# Altium PCB PCB1.PcbDoc
Units mm, origin at the board's own origin, x right, y up, seen from the top; angles counter-clockwise.
Board outline 56.33 x 87.03 mm, 2 copper layers (Top Layer, Bottom Layer), stack 1.752 mm thick; 33 components, 36 nets, 139 pads, 24 vias.
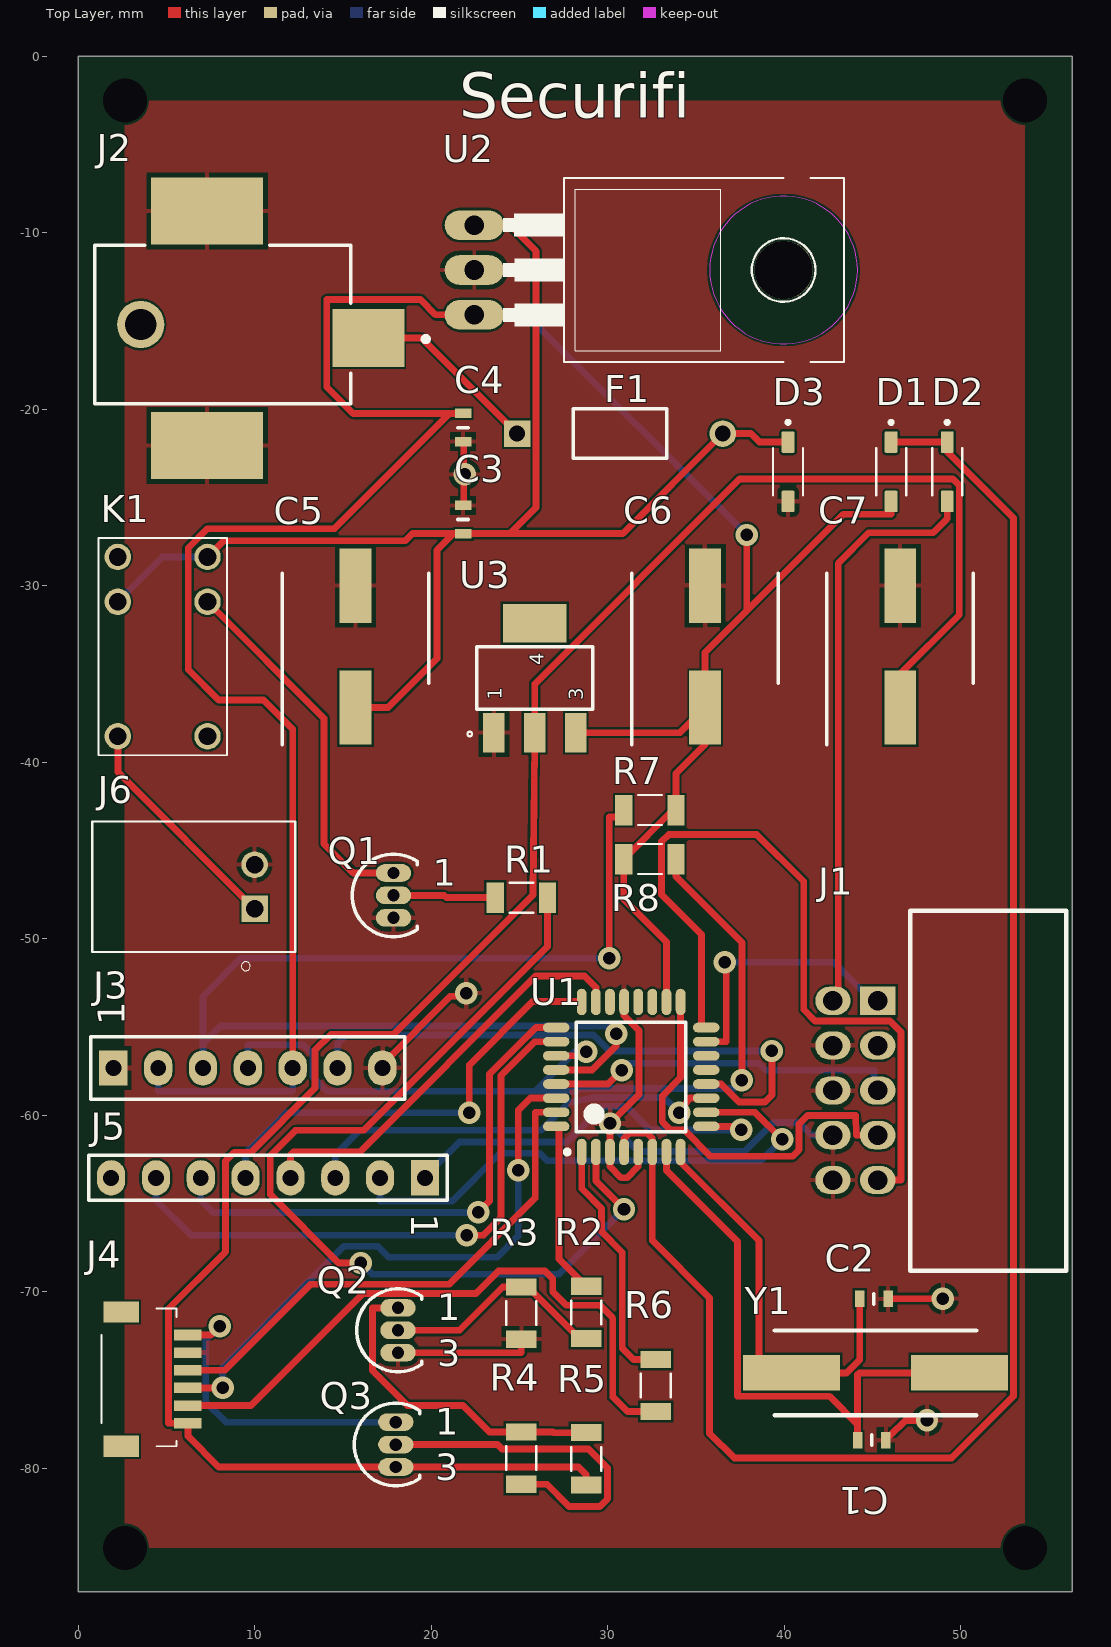
[diagram p0: Top Layer view]
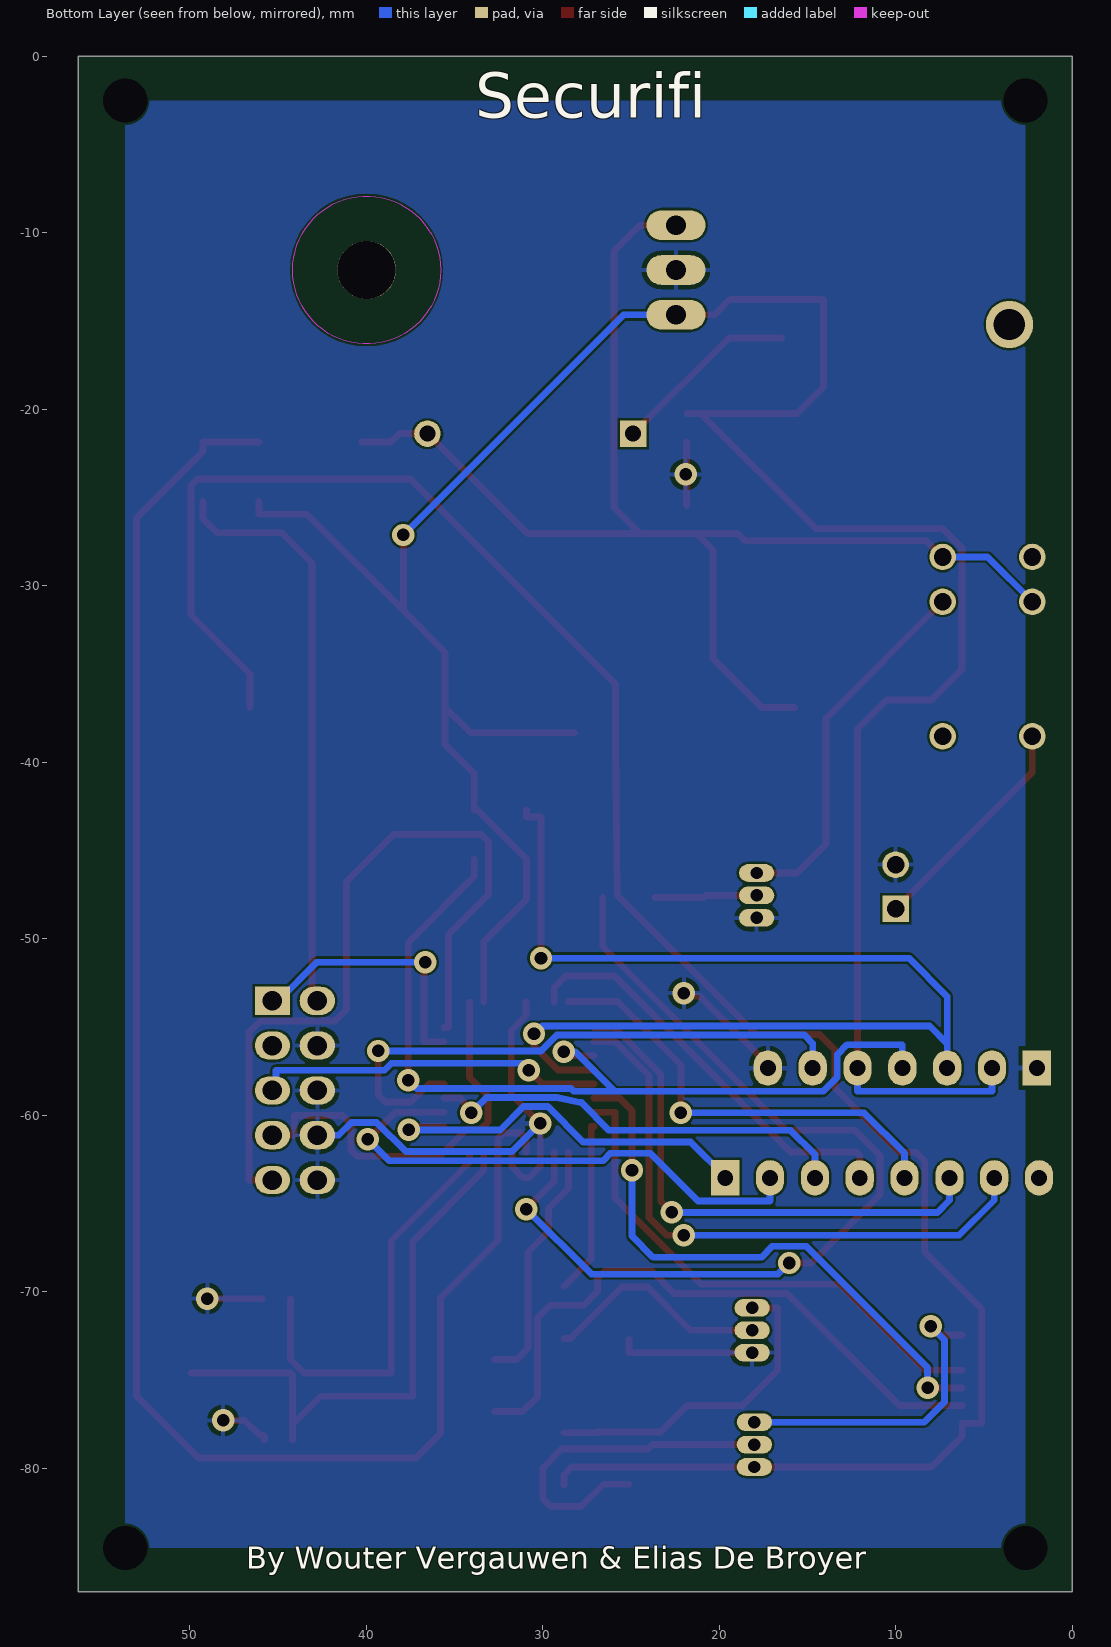
[diagram p1: Bottom Layer view, seen from below]
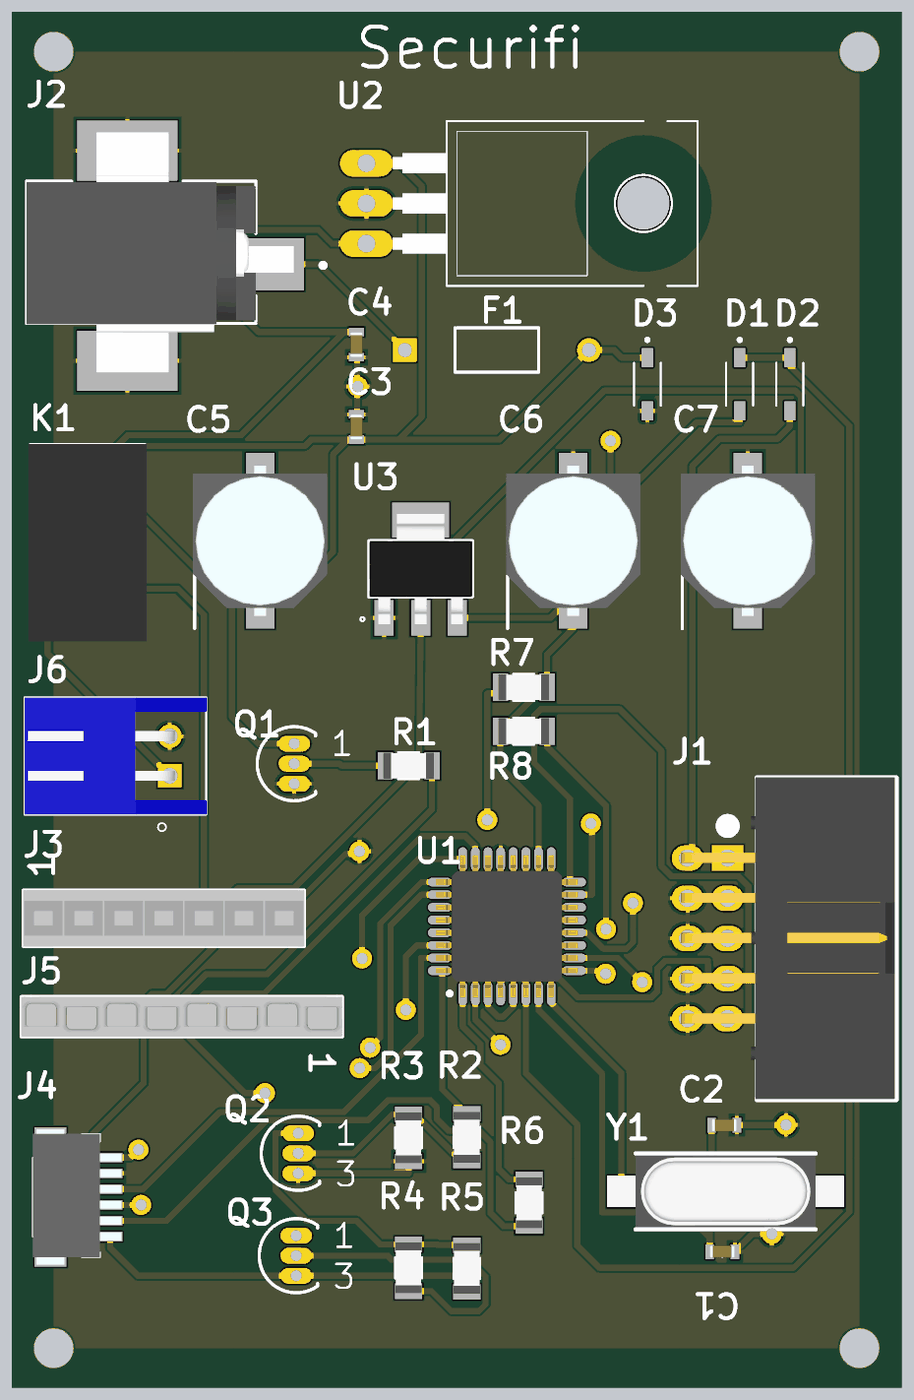
[diagram p2: 3D render of the assembled board from above, using the file's embedded part models]

## Layer stack, top to bottom
Top Solder: solder mask 0.01, Solder Resist, Dk 3.5
Top Layer: signal copper 0.0762
Dielectric 1: dielectric 1.6, FR-4, Dk 4.8
Bottom Layer: signal copper 0.0762
Bottom Solder: solder mask 0.01, Solder Resist, Dk 3.5

## Board outline
-0.002,-87.025 56.325,-87.025 56.325,0 -0.002,0

## Design rules (kind name [scope] priority, off if disabled: settings)
BoardOutlineClearance [All] p1: gap=0.2 ignorepadtopadclearanceinfootprint=FALSE
Clearance [All] p1: gap=0.127 ignorepadtopadclearanceinfootprint=TRUE
HoleSize [All] p1: absolutevalues=TRUE maxlimit=3.302 minlimit=0.025 maxpercent=80.000 minpercent=20.000
HoleToHoleClearance [All] p1: gap=0.127 allowstackedmicrovias=TRUE
MinimumAnnularRing [All] p1: minimumring=0.076
MinimumSolderMaskSliver [All] p1: minsoldermaskwidth=0.025
PolygonConnect [All] p1: connectstyle=Relief reliefconductorwidth=0.254 reliefentries=4 polygonreliefangle="90 Angle" airgapwidth=0.254
RoutingVias [All] p1: holewidth=0.711 width=1.27 viastyle="Through Hole" minholewidth=0.711 minwidth=1.27 maxholewidth=0.711 maxwidth=1.27
SilkToSilkClearance [All] p1: silktosilkclearance=0
SilkToSolderMaskClearance [IsPad] p1: minsilkscreentomaskgap=0 clearancetoexposedcopper=TRUE
SolderMaskExpansion [All] p1: expansion=0.102 istentingtop=FALSE
UnRoutedNet [All] p1: checkbadconnections=TRUE
Width [All] p1: maxlimit=0.5 minlimit=0.386 preferedwidth=0.386
24 further rules are at their usual default settings.

## Components (designator, comment, footprint, x,y, rotation, side; value= is the part's Value field where it differs from the comment)
C1 "C0603C104K5RACTU" CAPC1608X80N 44.965,-78.419 r180 top value=18pF
C2 "C0603C104K5RACTU" CAPC1608X80N 45.092,-70.418 r180 top value=18pF
C3 "C0603C104K5RACTU" CAPC1608X80N 21.813,-26.26 r270 top value=100nF
C4 "C0603C104K5RACTU" CAPC1608X80N 21.813,-21.053 r90 top value=100nF
C5 "EEE2AA100UP" CAPAE830X650N 15.717,-33.461 r90 top value=10µF
C6 "EEE2AA100UP" CAPAE830X650N 35.529,-33.461 r90 top value=10µF
C7 "EEE2AA100UP" CAPAE830X650N 46.578,-33.461 r90 top value=10µF
D1 "1N4148W-7-F" SOD3715X135N 46.07,-23.555 r270 top
D2 "1N4148W-7-F" SOD3715X135N 49.245,-23.555 r270 top
D3 "1N4148W-7-F" SOD3715X135N 40.228,-23.555 r270 top
F1 "" PIN-W2/E2.8 30.703,-21.396 r0 top
J1 "61201021721" Male_10Pin 44.038,-57.591 r0 top
J2 "RASM722X" RASM722X 10.002,-15.427 r270 top
J3 "1x7" DIP7 9.621,-57.337 r90 top
J4 "665106131822" 665106131822 3.779,-74.863 r270 top
J5 "215297-8" DIP8 10.764,-63.56 r270 top
J6 "S2B-XH-A(LF)(SN) (2)" JST_S2B-XH-A(LF)(SN) 10.002,-47.07 r90 top
K1 "G5V-1 12DC" G5V-1 4.795,-33.461 r270 top
Q1 "BC547B" TO-92 17.876,-47.558 r0 top
Q2 "BC547B" TO-92 18.13,-72.196 r0 top
Q3 "BC557ATA" TO-92 18.003,-78.673 r0 top
R1 "CRCW08051K00FKEAHP" RESC3116X65N 25.115,-47.685 r0 top value=1K
R2 "CRCW08051K00FKEAHP" RESC3116X65N 28.798,-71.185 r90 top value=1K
R3 "CRCW120610K0FKEAHP" RESC3116X65N 25.115,-71.224 r90 top value=10K
R4 "CRCW08051K00FKEAHP" RESC3116X65N 25.115,-79.44 r90 top value=1K
R5 "CRCW2512100KFKEG" RESC3116X65N 28.798,-79.479 r270 top value=100K
R6 "CRCW08051K00FKEAHP" RESC3116X65N 32.735,-75.327 r90 top value=1K
R7 "CRCW06031K80FKEA" RESC3116X65N 32.4,-42.725 r180 top value=1K8
R8 "CRCW06031K80FKEA" RESC3116X65N 32.4,-45.5 r0 top value=1K8
U1 "ATMEGA328P-MU" TQFP80P900X900X120-32N 31.338,-57.845 r90 top
U2 "LM7805" TO220 31.211,-12.125 r270 top
U3 "NCP1117ST33T3G" SOT223 25.877,-35.239 r90 top
Y1 "9C-8.000MAAJ-T" SMD-HC-49-S 45.181,-74.609 r180 top

## Footprints (in the part's own frame and the unit in brackets; to place one, negate y for a bottom-side part, rotate by r counter-clockwise, add the part's x,y. Pads: shape width x height; smd on the part's side, far side on the other; paste and mask are expansions set on the pad)
665106131822 [mm]
  rect 0.6x1.55 smd: 1(-2.4,2.444) 2(-1.4,2.444) 3(-0.4,2.444) 4(0.6,2.444) 5(1.6,2.444) 6(2.6,2.444)
  rect 1.2x2 smd: 7(-3.7,-1.331) 8(3.9,-1.331)
  silkscreen extent -3.9,-2.44 3.9,1.81, body extent -4.18,-2.44 4.38,3.16, height 3
CAPAE830X650N [mm]
  rect 4.2x1.8 smd: 1(-3.45,0) 2(3.45,0)
  silkscreen extent -5.55,-4.15 4.15,4.15, body extent -4.75,-4.25 4.75,4.25, height 6.5
CAPC1608X80N [mm]
  rect 0.54x0.94 smd: 1(-0.8,0) 2(0.8,0)
  silkscreen extent 0,-0.3 0,0.3, body extent -0.8,-0.4 0.8,0.4, height 0.8
DIP7 [mm]
  rect 2x1.6 hole 0.9: 1(0,7.62)
  oval 2x1.6 hole 0.9: 2(0,5.08) 3(0,2.54) 4(0,0) 5(0,-2.54) 6(0,-5.08) 7(0,-7.62)
  silkscreen extent -1.78,-8.89 1.78,8.89, body extent -1.78,-8.89 1.78,8.89, height 8.64
DIP8 [mm]
  rect 2x1.6 hole 0.9: 1(0,8.89)
  oval 2x1.6 hole 0.9: 2(0,6.35) 3(0,3.81) 4(0,1.27) 5(0,-1.27) 6(0,-3.81) 7(0,-6.35) 8(0,-8.89)
  silkscreen extent -1.27,-10.16 1.27,10.16, body extent -1.27,-10.16 1.25,10.16, height 2.89
G5V-1 [mm]
  round 1.5 hole 1: 1(-5.08,-2.54) 2(-2.54,-2.54) 5(5.08,-2.54) 6(5.08,2.54) 9(-2.54,2.54) 10(-5.08,2.54)
  silkscreen extent -6.15,-3.64 6.15,3.64, body extent -6.12,-3.75 6.38,3.75, height 10.01
JST_S2B-XH-A(LF)(SN) [mm]
  rect 1.508x1.508 hole 1: 1(-1.25,0)
  round 1.508 hole 1: 2(1.25,0)
  silkscreen extent -4.75,-2.3 3.7,9.2, body extent -3.7,-2.32 3.7,9.18, height 5.95
Male_10Pin [mm]
  rect 2x1.6 hole 1.1: 1(1.27,4.064)
  oval 2x1.6 hole 1.1: 2(-1.27,4.064) 3(1.27,1.524) 4(-1.27,1.524) 5(1.27,-1.016) 6(-1.27,-1.016) 7(1.27,-3.556) 8(-1.27,-3.556) 9(1.27,-6.096) 10(-1.27,-6.096)
  round 1.524 on Top Overlay: ""(1.27,6.096)
  silkscreen extent 3.11,-11.24 11.96,9.16, body extent -1.7,-11.18 11.85,9.18, height 8.86
PIN-W2/E2.8 [mm] "Thru-Hole; 2 Leads"
  rect 1.5x1.5 hole 0.9: 1(-5.825,0)
  round 1.5 hole 0.9: 2(5.825,0)
  silkscreen extent -2.65,-1.4 2.65,1.4
RASM722X [mm]
  rect 3.3x4.06 smd: 1(0.545,6.45)
  rect 3.81x6.35 smd: 2(-6.645,-2.69) 3(6.645,-2.69)
  round 2.68 hole 1.78: 4(-0.215,-6.45)
  silkscreen extent -4.72,-9.06 4.28,9.84, body extent -7.82,-9.06 7.39,7.84, height 11.09
RESC3116X65N [mm]
  rect 0.97x1.73 smd: 1(-1.48,0) 2(1.48,0)
  silkscreen extent -0.67,-0.85 0.67,0.85, body extent -1.6,-0.83 1.6,0.83, height 0.54
SMD-HC-49-S [mm]
  rect 5.5x2 smd: 1(-4.75,0) 2(4.75,0)
  silkscreen extent -5.7,-2.4 5.7,2.4, body extent -7.5,-2.25 7.5,2.25, height 5.1
SOD3715X135N [mm]
  rrect18% 1.21x0.73 smd: A(1.68,0) C(-1.68,0)
  silkscreen extent -2.9,-0.85 1.35,0.85
SOT223 [mil]
  rect 88x48 smd: 1(-122,91) 2(-122,0) 3(-122,-91)
  rect 86.61x141.73 smd: 4(122,0)
  silkscreen extent -130,-129 70,150, body extent -137,-128 137,128, height 63
TO220 [mil]
  oval 66x132 hole 44: 1(-100,-345) 2(0,-345) 3(100,-345)
  round 130 hole 130 unplated: ""(0,345)
  Keep-Out Layer circle w0: c0,345 r165
  Keep-Out Layer circle w0: c0,345 r165
  silkscreen extent -205,-280 205,480
TO-92 [mm] "TO, Flat Index; 3 In-Line, Axial Leads; Body Dia. 4.6mm; Leads 0.41 x 0.39 mm (max)"
  oval 2x1 hole 0.7: 1(0,1.27) 2(0,0) 3(0,-1.27)
  silkscreen extent -2.34,-2.34 1.35,2.34
TQFP80P900X900X120-32N [mm] "TQFP, 32-Leads, Body 7.00x7.00mm, Pitch 0.80mm, IPC Medium Density"
  oval 1.5x0.55 smd: 1(-4.25,2.8) 2(-4.25,2) 3(-4.25,1.2) 4(-4.25,0.4) 5(-4.25,-0.4) 6(-4.25,-1.2) 7(-4.25,-2) 8(-4.25,-2.8) 17(4.25,-2.8) 18(4.25,-2) 19(4.25,-1.2) 20(4.25,-0.4) 21(4.25,0.4) 22(4.25,1.2) 23(4.25,2) 24(4.25,2.8)
  oval 0.55x1.5 smd: 9(-2.8,-4.25) 10(-2,-4.25) 11(-1.2,-4.25) 12(-0.4,-4.25) 13(0.4,-4.25) 14(1.2,-4.25) 15(2,-4.25) 16(2.8,-4.25) 25(2.8,4.25) 26(2,4.25) 27(1.2,4.25) 28(0.4,4.25) 29(-0.4,4.25) 30(-1.2,4.25) 31(-2,4.25) 32(-2.8,4.25)
  silkscreen extent -4.37,-3.1 3.1,3.75, body extent -4.5,-4.5 4.5,4.5, height 1.6

## Part data
C1 C2 C3 C4: library part Cap, "Capacitor", Supplier Part Number 1=2392305, LatestRevisionDate=17-Jul-2002, LatestRevisionNote="Re-released for DXP Platform.", PackageDescription="Radial Cap, Thru-Hole; 2 Leads; 0.3 in Pin Spacing", PackageReference=RAD-0.3, Published=8-Jun-2000, Publisher="Altium Limited", Supplier 1=Farnell
C5 C6 C7: library part Cap2, "Capacitor", Supplier Part Number 1=2805714, PackageDescription="Capacitor; 2 Leads", PackageReference=CAPR5-4X5, Published=23-Sep-2002, Publisher="Altium Limited", Supplier 1=Farnell
D1 D2 D3: "Diode Standard 100V 300mA _DC_ Surface Mount SOD-123", Package="SOD-123 Diodes Inc.", Supplier Part Number 1=1776392, Availability=Unavailable, MF="Diodes Inc.", MP=1N4148W-7-F, Price=None, SnapEDA_Link=https://www.snapeda.com/parts/1N4148W-7-F/Diodes%20Inc./view-part/16/?ref=snap, Supplier 1=Farnell
F1: library part "Fuse 1", "Fuse", Supplier Part Number 1=9949585, LatestRevisionDate=17-Jul-2002, LatestRevisionNote="Re-released for DXP Platform.", PackageDescription="Thru-Hole; 2 Leads", PackageReference=PIN-W2/E2.8, Published=8-Jun-2000, Publisher="Altium Limited", Supplier 1=Farnell
J1: "CONN HEADER R/A 10POS 2.54MM", Color=Black, Current Rating=3A, Flammability Rating="UL94 V-0", Insulation Resistance=1GR, Manufacturer="Wurth Electronics", Max Operating Temperature=125°C, Min Operating Temperature=-40°C, Package Quantity=260, Supplier Part Number 1=732-2098-ND, Voltage Rating=250V, Category="Headers and Wire Housings", ComponentLink1Description=https://datasheet.ciiva.com/731/61201021721-731348.pdf?src-supplier=Digi-Key, ComponentLink1URL=https://datasheet.ciiva.com/731/61201021721-731348.pdf?src-supplier=Digi-Key, ComponentLink2Description=https://datasheet.ciiva.com/13679/6120xx21721-265860-13679056.pdf?src-supplier=Mouser, ComponentLink2URL=https://datasheet.ciiva.com/13679/6120xx21721-265860-13679056.pdf?src-supplier=Mouser, ComponentLink3Description=https://datasheet.ciiva.com/7648/624622-7648122.pdf?src-supplier=Element14, ComponentLink3URL=https://datasheet.ciiva.com/7648/624622-7648122.pdf?src-supplier=Element14, ComponentLink4Description=https://datasheet.ciiva.com/48700/001088159-da-01-en-wr-bhd-wannenstiftleiste-61201021721-48700602.pdf?src-supplier=Conrad, ComponentLink4URL=https://datasheet.ciiva.com/48700/001088159-da-01-en-wr-bhd-wannenstiftleiste-61201021721-48700602.pdf?src-supplier=Conrad, Connector Type="Male Pin", Contact Gender=Male, Contact Material="Copper Alloy,Copper", Contact Plating=Gold, Gender=Male, Height=8.85mm, Housing Material=PBT, Insulation=Insulated, Length=20.36mm, Manufacturer Part Number=61201021721, Mount="Through Hole", Number of Contacts=10, Number of Positions=10, Number of Rows=2, Orientation="Right Angle", Packaging=Tray, Pitch=2.54mm, Pricing 1="1=0,59000, 10=0,58200, 50=0,53800, 100=0,48200, 260=0,43738 (USD)", REACH SVHC=Unknown, RoHS=Yes, Row Spacing=0.1inch, Stock 1=2053, Supplier 1=Digi-Key, Termination="Through Hole", Width=20.36mm
J2: "SWC RASM722X Connectors > Audio - Video > Circular-Audio > XLR - Connector", Color=Black, Current Rating=5A, Manufacturer=Switchcraft, Package Quantity=1, Supplier Part Number 1=1608728, Voltage Rating (AC)=250V, Body Material=Thermoplastic, Category=Connectors, ComponentLink1Description=https://datasheet.ciiva.com/7661/640105-7661962.pdf?src-supplier=Element14, ComponentLink1URL=https://datasheet.ciiva.com/7661/640105-7661962.pdf?src-supplier=Element14, ComponentLink2Description=https://datasheet.ciiva.com/391/edg4-391815.pdf?src-supplier=Digi-Key, ComponentLink2URL=https://datasheet.ciiva.com/391/edg4-391815.pdf?src-supplier=Digi-Key, ComponentLink3Description=https://datasheet.ciiva.com/16879/70214270-16879445.pdf?src-supplier=Allied+Electronics, ComponentLink3URL=https://datasheet.ciiva.com/16879/70214270-16879445.pdf?src-supplier=Allied+Electronics, Connector Type=Jack,Power, Contact Material="Copper Alloy,Brass", Contact Plating=Tin,Nickel, Depth=17.1mm, Gender=Male, Housing Color=Black, Housing Material=Thermoplastic, Lead Free="Lead Free", Length=15.2mm, Manufacturer Part Number=RASM722X, Max Current Rating=5A, Mount="Surface Mount,PCB", Number of Contacts=2, Number of Ports=1, Number of Terminals=3, Orientation="Right Angle", Packaging=Bulk, Pricing 1="1=2,37000, 10=1,78000, 50=1,60000, 100=1,43000, 250=1,33000, 500=1,30000 (EUR)", REACH SVHC="No SVHC", RoHS=Yes, Shielding=Unshielded, Stock 1=4265, Supplier 1=Farnell, Termination=Solder
J3: library part 534237-5, "7 pin header voor schermpje", Color=Black, Contact Current Rating=2A, Contact Resistance=12MR, Flammability Rating="UL94 V-0", High Temperature Compatible=No, Insulation Resistance=5GR, Manufacturer="TE Connectivity", Max Operating Temperature=105°C, Min Operating Temperature=-65°C, Package Quantity=32, Supplier Part Number 1=A26419-ND, Voltage Rating=750V, Approvals=CSA, Boss="No (Without)", Category="Headers and Wire Housings", ComponentLink1Description=https://datasheet.ciiva.com/3118/eng-ds-1307819-ampmodu-0811-3118408.pdf?src-supplier=Avnet, ComponentLink1URL=https://datasheet.ciiva.com/3118/eng-ds-1307819-ampmodu-0811-3118408.pdf?src-supplier=Avnet, ComponentLink2Description=https://datasheet.ciiva.com/743/eng-cd-534237-r5-743694.pdf?src-supplier=Digi-Key, ComponentLink2URL=https://datasheet.ciiva.com/743/eng-cd-534237-r5-743694.pdf?src-supplier=Digi-Key, Connector Type=Receptacle,Connector,Socket, Contact Material=Bronze, Contact Plating=Gold,Tin,Lead, Contact Post Length=2.92mm, Contact Shape=Square, Current Rating=2A, Depth=3.56mm, ELV=Non-Compliant, Gender=Female, Height=3.56mm, Housing Color=Black, Housing Material=Polyester, Lead Free="Contains Lead", Length=17.78mm, Manufacturer Part Number=534237-5, Mount="Through Hole", Number of Contacts=7, Number of Positions=7, Number of Rows=1, Orientation=Straight, Packaging=Rail/Tube, PCB Mount Retention=Without, PCB Mounting Orientation=Vertical, PCB Thickness=2.4mm, Pitch=2.54mm, Pricing 1="1=1,62000, 10=1,47000, 100=1,26000, 500=1,05000, 1000=0,90000, 5000=0,79800, 10000=0,78000 (USD)", Radiation Hardening=No, RoHS=Yes, Row Spacing=0.1inch, Sealable="No (Without)", Stackable=Yes, Stock 1=4174, Supplier 1=Digi-Key, Tail Length=2.92mm, Termination=Solder
J4: library part SM06B-SRSS-TB_LF_SN, Supplier Part Number 1=2470758, Supplier 1=Farnell
J5: "8 pin female keypad", Color=Green, Contact Current Rating=3A, Contact Resistance=12mR, Flammability Rating="UL94 V-0", Housing Color=Black, Manufacturer="TE Connectivity", Max Operating Temperature=105°C, Min Operating Temperature=-55°C, Package Quantity=88, Supplier Part Number 1=A106654-ND, Category="Headers and Wire Housings", ComponentLink1Description=https://datasheet.ciiva.com/30062/2152978-30062389.pdf?src-supplier=Onlinecomponents.com, ComponentLink1URL=https://datasheet.ciiva.com/30062/2152978-30062389.pdf?src-supplier=Onlinecomponents.com, ComponentLink2Description=https://datasheet.ciiva.com/11747/0900766b805762f6-11747560.pdf?src-supplier=RSComponents, ComponentLink2URL=https://datasheet.ciiva.com/11747/0900766b805762f6-11747560.pdf?src-supplier=RSComponents, ComponentLink3Description=https://datasheet.ciiva.com/29369/001094895-da-01-en-buchsenleiste-1-reihig-0-0215297-8-29369956.pdf?src-supplier=Conrad, ComponentLink3URL=https://datasheet.ciiva.com/29369/001094895-da-01-en-buchsenleiste-1-reihig-0-0215297-8-29369956.pdf?src-supplier=Conrad, ComponentLink4Description=https://datasheet.ciiva.com/6857/eng-cd-215297-d-basefilename-6857496.pdf?src-supplier=Digi-Key, ComponentLink4URL=https://datasheet.ciiva.com/6857/eng-cd-215297-d-basefilename-6857496.pdf?src-supplier=Digi-Key, Connector Type=Receptacle,Connector,Socket, Contact Gender=Female, Contact Material=Bronze, Contact Plating=Gold,Tin, Contact Post Length=3.1mm, Contact Shape=Square, Current Rating=3A, Depth=2.52mm, ELV=Compliant, Fastening Type=Push,Pull, Gender=Receptacle, Height=7mm, Housing Material=Polyester, Insulation Color=Green, Insulation Material=Glass, Length=20.32mm, Manufacturer Part Number=215297-8, Mount="Through Hole", Number of Contacts=8, Number of Positions=8, Number of Rows=1, Orientation=Straight, Packaging=Tray, PCB Mount Retention=With, PCB Mounting Orientation=Vertical, PCB Thickness=1.6mm, Pitch=2.54mm, Pricing 1="1=1,97000, 10=1,78900, 100=1,53300, 500=1,27750, 1000=1,09500, 5000=0,97090, 10000=0,94900 (USD)", Radiation Hardening=No, REACH SVHC=Unknown, RoHS=Yes, Sealable="No (Without)", Stackable=Yes, Stock 1=17481, Supplier 1=Digi-Key, Tail Length=3.1mm, Termination=Solder
J6: "Conn Shrouded Header HDR 2 POS 2.5mm Solder RA Thru-Hole Box", Color=Natural, Contact Resistance=20mR, Current Rating=3A, Housing Color=White, Insulation Resistance=1GR, Manufacturer=JST, Manufacturer Part Number=S2B-XH-A(LF)(SN), Max Operating Temperature=85°C, Max Voltage Rating (AC)=250V, Min Operating Temperature=-25°C, Package Quantity=1000, Supplier Part Number 1=1516289, Category="Headers and Wire Housings", ComponentLink1Description=https://datasheet.ciiva.com/16208/s2b-xh-alfsn-16208978.pdf?src-supplier=Future+Electronics, ComponentLink1URL=https://datasheet.ciiva.com/16208/s2b-xh-alfsn-16208978.pdf?src-supplier=Future+Electronics, ComponentLink2Description=https://datasheet.ciiva.com/8052/1684882-8052211.pdf?src-supplier=Element14, ComponentLink2URL=https://datasheet.ciiva.com/8052/1684882-8052211.pdf?src-supplier=Element14, ComponentLink3Description=https://datasheet.ciiva.com/11746/0900766b8082f560-11746947.pdf?src-supplier=RSComponents, ComponentLink3URL=https://datasheet.ciiva.com/11746/0900766b8082f560-11746947.pdf?src-supplier=RSComponents, ComponentLink4Description=https://datasheet.ciiva.com/26894/getdatasheetpartid-640270-26894603.pdf?src-supplier=Verical, ComponentLink4URL=https://datasheet.ciiva.com/26894/getdatasheetpartid-640270-26894603.pdf?src-supplier=Verical, ComponentLink5Description=https://datasheet.ciiva.com/26924/getdatasheetpartid-645395-26924076.pdf?src-supplier=Verical, ComponentLink5URL=https://datasheet.ciiva.com/26924/getdatasheetpartid-645395-26924076.pdf?src-supplier=Verical, ComponentLink6Description=https://datasheet.ciiva.com/26894/getdatasheetpartid-441330-26894909.pdf?src-supplier=Verical, ComponentLink6URL=https://datasheet.ciiva.com/26894/getdatasheetpartid-441330-26894909.pdf?src-supplier=Verical, ComponentLink7Description=https://datasheet.ciiva.com/726/exh-726412.pdf?src-supplier=Digi-Key, ComponentLink7URL=https://datasheet.ciiva.com/726/exh-726412.pdf?src-supplier=Digi-Key, ComponentLink8Description=https://datasheet.ciiva.com/20207/523653-20207183.pdf?src-supplier=Rapid+Electronics, ComponentLink8URL=https://datasheet.ciiva.com/20207/523653-20207183.pdf?src-supplier=Rapid+Electronics, Connector Type="Male Pin", Contact Material=Brass, Contact Plating=Tin,Copper,Lead, Depth=11.5mm, Gender=Male, Housing Material=Polyamide, Lead Free="Lead Free", Lead Pitch=2.5mm, Length=7.4mm, Max Current Rating=3A, Max Voltage Rating (DC)=250V, Mount="Through Hole", Number of Contacts=2, Number of Positions=2, Number of Rows=1, Orientation="Right Angle", Packaging=Bulk, Pitch=2.5mm, Pricing 1="100=0,10300, 500=0,08760, 1000=0,07160, 2500=0,06770, 5000=0,06370, 10000=0,05770 (EUR)", REACH SVHC="No SVHC", RoHS=Yes, Stock 1=54713, Supplier 1=Farnell, Termination=Press-Fit, Voltage Rating=250V, Voltage Rating (AC)=250V, Wire/Cable Gauge=22AWG
K1: library part Relay-SPDT, "Single-Pole Dual-Throw Relay", Supplier Part Number 1=9949585, LatestRevisionDate=17-Jul-2002, LatestRevisionNote="Re-released for DXP Platform.", PackageReference=MODULE5B, Published=24-Mar-1999, Publisher="Altium Limited", Supplier 1=Farnell
Q1 Q2: library part NPN, "NPN Bipolar Transistor", Supplier Part Number 1=1017673, Code_JEDEC=TO-226-AA, LatestRevisionDate=17-Jul-2002, LatestRevisionNote="Re-released for DXP Platform.", PackageDescription="TO, Flat Index; 3 In-Line, Axial Leads; Body Dia. 4.8mm; Leads 0.55 x 0.51 mm (max)", PackageReference=TO-226-AA, Published=8-Jun-2000, Publisher="Altium Limited", Supplier 1=Farnell
Q3: library part PNP, "PNP Bipolar Transistor", Supplier Part Number 1=2453803, LatestRevisionDate=29-May-2009, LatestRevisionNote="IPC-7351 Footprint Added.", PackageDescription="3-Pin SOT-23 Package 0.95 mm Pitch, 2.4 mm Lead Span", PackageReference=SOT-23B, PackageVersion=Aug-1999, Published=8-Jun-2000, Publisher="Altium Limited", Supplier 1=Farnell
R1 R2 R4 R6: library part Res2, "Resistor", Supplier Part Number 1=1738959, LatestRevisionDate=17-Jul-2002, LatestRevisionNote="Re-released for DXP Platform.", PackageDescription="Axial Device, Thru-Hole; 2 Leads; 0.4 in Pin Spacing", PackageReference=AXIAL-0.4, Published=8-Jun-2000, Publisher="Altium Limited", Supplier 1=Farnell
R3: library part Res2, "Resistor", Supplier Part Number 1=1739026, LatestRevisionDate=17-Jul-2002, LatestRevisionNote="Re-released for DXP Platform.", PackageDescription="Axial Device, Thru-Hole; 2 Leads; 0.4 in Pin Spacing", PackageReference=AXIAL-0.4, Published=8-Jun-2000, Publisher="Altium Limited", Supplier 1=Farnell
R5: library part Res2, "Resistor", Supplier Part Number 1=2614347, LatestRevisionDate=17-Jul-2002, LatestRevisionNote="Re-released for DXP Platform.", PackageDescription="Axial Device, Thru-Hole; 2 Leads; 0.4 in Pin Spacing", PackageReference=AXIAL-0.4, Published=8-Jun-2000, Publisher="Altium Limited", Supplier 1=Farnell
R7 R8: library part Res2, "Resistor", Supplier Part Number 1=1738908, LatestRevisionDate=17-Jul-2002, LatestRevisionNote="Re-released for DXP Platform.", PackageDescription="Axial Device, Thru-Hole; 2 Leads; 0.4 in Pin Spacing", PackageReference=AXIAL-0.4, Published=8-Jun-2000, Publisher="Altium Limited", Supplier 1=Farnell
U1: "MICROCHIP - ATMEGA328P-MU - MCU 8BIT, AVR, 32K FLASH, 32QFN", Case/Package=VQFN, Frequency=20MHz, Manufacturer=Microchip, Max Operating Temperature=85°C, Min Operating Temperature=-40°C, Supplier Part Number 1=ATMEGA328P-MU-ND, Category=Microcontrollers, ComponentLink1Description=http://www.farnell.com/datasheets/2047852.pdf?src-supplier=Farnell, ComponentLink1URL=http://www.farnell.com/datasheets/2047852.pdf?src-supplier=Farnell, ComponentLink2Description=http://www.microchip.com/mymicrochip/filehandler.aspx?ddocname=en589968&src-supplier=Digi-Key, ComponentLink2URL=http://www.microchip.com/mymicrochip/filehandler.aspx?ddocname=en589968&src-supplier=Digi-Key, ComponentLink3Description=http://www.farnell.com/datasheets/798182.pdf?src-supplier=Newark, ComponentLink3URL=http://www.farnell.com/datasheets/798182.pdf?src-supplier=Newark, ComponentLink4Description=http://www.farnell.com/datasheets/2047852.pdf?src-supplier=Element14, ComponentLink4URL=http://www.farnell.com/datasheets/2047852.pdf?src-supplier=Element14, Core Architecture=AVR, Interface=I2C,SPI,UART,USART, Manufacturer Part Number=ATMEGA328P-MU, Memory Size=32KB, Memory Type=FLASH, Number of I/Os=23, Oscillator Type=Internal, Packaging=Tray, Peripherals="Brown-out Detect/Reset,POR,PWM,WDT", Pricing 1="1=2,01000, 25=1,84000, 100=1,67000 (USD)", RoHS=No, Stock 1=5700, Supplier 1=Digi-Key
U2: "Linear Voltage Regulator IC 1 Output 1.5A SOT-223-4", Package="TO-220 Texas Instruments", Availability=Unavailable, MF="Texas Instruments", MP=LM7805, Price=None, SnapEDA_Link=https://www.snapeda.com/parts/LM7805/Texas%20Instruments/view-part/2302466/?ref=snap
U3: "Linear Voltage Regulator IC 1 Output 1A SOT-223", Package="TO-261-4 HTC Korea", Availability=Unavailable, MF="ON Semiconductor", MP=NCP1117ST33T3G, Price=None, SnapEDA_Link=https://www.snapeda.com/parts/NCP1117ST33T3G/ON%20Semiconductor/view-part/802519/?ref=snap
Y1: library part XTAL, "Crystal Oscillator", Supplier Part Number 1=1842346, LatestRevisionDate=17-Jul-2002, LatestRevisionNote="Re-released for DXP Platform.", PackageDescription="Crystal, Thru-Hole; 2 Leads; Body 3.1 x 8.2 mm (Dia.xH)", PackageReference=R38, Published=8-Jun-2000, Publisher="Altium Limited", Supplier 1=Farnell

## Free pads (board coordinates)
  round 1.524 hole 2.5: 7(53.65,-84.525) 8(2.65,-84.525) 9(2.65,-2.525) 10(53.65,-2.525)

## Via types
v1: diameter 1.27, hole 0.711, Top Layer to Bottom Layer, 24 vias

## Nets (pads, with @x,y where several pads share a name; then routed paths per layer and width w, separated by ;. In a path a pad name is that pad's centre, name@x,y a point inside that pad or via, vN(x,y) a via of type N, cw(c..) or ccw(c..) an arc to the next point about the centre after c; other vN are vias at no path point)
+3.3: C7.1 J4.6 Q3.3 R5.2 U3.2 | length 122
  Top Layer w0.386: R5.2 28.798,-80.387 28.353,-79.943 Q3.3 7.97,-79.943 6.223,-78.196 J4.6 5.125,-77.463 5.125,-70.977 8.351,-67.751 8.351,-62.607 8.846,-62.112 9.799,-62.112 13.431,-58.48 13.431,-56.321 14.32,-55.432 17.876,-55.432 25.775,-47.533 25.877,-38.871 U3.2 25.877,-35.569 37.485,-23.961 49.562,-23.961 49.931,-24.33 49.931,-31.658 46.578,-35.01 C7.1
+5: C4.2 C6.1 D1.A J3.2 J3.5 R7.1 R8.1 U1.18 U2.3 U3.3 | length 153.8
  Top Layer w0.386: J3.5 12.161,-38.135 10.51,-36.484 7.97,-36.484 6.243,-34.756 6.243,-27.873 7.335,-26.781 14.523,-26.781 21.051,-20.253 ; C4.2 21.051,-20.253 ; U2.3 20.264,-14.665 19.4,-13.801 14.091,-13.801 14.091,-18.754 15.59,-20.253 21.051,-20.253 ; U3.3 34.102,-38.338 C6.1 ; U1.18 33.338,-50.205 30.92,-47.787 R8.1 33.695,-42.725 R7.1 33.88,-40.649 35.529,-39 C6.1 ; v1(37.891,-27.136) 37.891,-31.429 ; D1.A 46.07,-25.968 43.352,-25.968 37.891,-31.429 ; C6.1 35.529,-33.791 37.891,-31.429
  Bottom Layer w0.386: J3.2 4.541,-58.658 12.161,-58.658 J3.5 ; U2.3 25.42,-14.665 v1(37.891,-27.136)
+12: F1.1 J2.1 | length 10.7
  Top Layer w0.386: J2.1 19.454,-15.972 F1.1
GND: C1.1 C2.1 C3.1 C4.1 C5.2 C6.2 C7.2 D3.A J1.4 J1.6 J1.8 J1.10 J2.2 J2.3 J3.1 J3.7 J4.2 J6.2 Q1.3 Q2.3 R3.1 U1.3 U1.5 U1.21 U2.2 U3.1 | length 51.6
  Top Layer w0.386: J3.7 17.241,-57.137 21.109,-53.269 21.831,-53.269 v1(22,-53.1) ; Q2.3 25.115,-73.466 R3.1 ; C3.1 21.856,-25.416 21.856,-21.896 C4.1 ; U1.21 30.938,-54.367 31.779,-55.207 31.779,-58.839 v1(30.138,-60.48) U1.3 30.138,-62.925 30.773,-63.56 31.103,-63.56 31.738,-62.925 U1.5 ; C1.1 45.765,-78.219 45.842,-78.142 46.042,-78.142 46.884,-77.3 v1(48.1,-77.3) ; C2.1 45.901,-70.409 48.991,-70.409 v1(49,-70.4)
  Bottom Layer w0.386: v1(30.138,-60.48) 31.735,-62.077 37.746,-62.077 39.402,-60.421 40.838,-60.421 41.564,-61.147 J1.8
  other v1: 21.9,-23.7
NetC1_2: C1.2 U1.7 Y1.1 | length 32.5
  Top Layer w0.386: U1.7 33.338,-63.147 37.358,-67.167 37.358,-75.93 42.565,-75.93 44.165,-77.53 ; C1.2 44.165,-77.53 ; Y1.1 44.267,-74.609 44.165,-74.711 44.165,-77.53
NetC2_2: C2.2 U1.8 Y1.2 | length 23.8
  Top Layer w0.386: U1.8 34.138,-62.677 38.577,-67.116 38.577,-74.609 Y1.2 43.53,-74.609 44.292,-73.847 C2.2
NetC3_2: C3.2 C5.1 D3.C F1.2 K1.2 K1.10 U2.1 | length 76.1
  Top Layer w0.386: K1.10 8.249,-27.467 18.536,-27.467 18.943,-27.06 21.28,-27.06 ; C5.1 15.717,-36.915 17.571,-36.915 20.34,-34.147 20.34,-28 21.28,-27.06 ; U2.1 24.48,-9.585 25.953,-11.058 25.953,-25.587 24.48,-27.06 ; D3.C 38.599,-21.875 38.12,-21.396 F1.2 30.864,-27.06 24.48,-27.06 ; 21.28,-27.06 C3.2 24.48,-27.06
  Bottom Layer w0.386: K1.2 4.795,-28.381 K1.10
NetD1_C: D1.C D2.C U1.4 U1.6 | length 98.7
  Top Layer w0.386: U1.4 30.938,-61.337 31.256,-61.02 32.22,-61.02 32.538,-61.337 U1.6 32.538,-67.122 35.783,-70.367 35.783,-78.038 37.18,-79.435 49.499,-79.435 53.004,-75.93 53.004,-26.171 49.245,-22.412 D2.C D1.C
NetD2_A: D2.A J1.2 | length 33.3
  Top Layer w0.386: J1.2 43.073,-53.527 43.073,-28.737 44.8,-27.009 48.458,-27.009 49.245,-26.222 D2.A
NetJ1_1: J1.1 U1.15 | length 15.2
  Top Layer w0.386: U1.15 36.723,-55.845 36.723,-51.419 v1(36.647,-51.343)
  Bottom Layer w0.386: v1(36.647,-51.343) 42.793,-51.343 44.978,-53.527 J1.1
NetJ1_5: J1.5 U1.29 | length 20
  Top Layer w0.386: U1.29 30.017,-58.245 v1(30.798,-57.464)
  Bottom Layer w0.386: v1(30.798,-57.464) 31.195,-57.068 38.567,-57.068 38.963,-57.464 45.105,-57.464 45.105,-58.607 J1.5
NetJ1_7: J1.7 U1.17 | length 23.1
  Top Layer w0.386: U1.17 34.138,-57.877 33.101,-58.914 33.101,-60.385 33.548,-60.832 34.325,-60.832 35.831,-62.338 40.487,-62.338 40.853,-61.972 40.853,-60.503 41.329,-60.027 44.061,-60.027 44.089,-61.147 J1.7
NetJ1_9: J1.9 U1.16 | length 44.1
  Top Layer w0.386: U1.16 35.326,-55.045 35.326,-49.768 33.065,-47.507 33.065,-44.51 33.472,-44.104 38.45,-44.104 41.117,-46.771 41.117,-54.035 41.752,-54.67 45.994,-54.67 46.629,-55.305 46.629,-63.687 J1.9
NetJ3_3: J3.3 R7.2 U1.28 | length 65.8
  Top Layer w0.386: U1.28 29.128,-57.445 30.491,-56.082 v1(30.491,-55.403) ; v1(30.093,-51.114) 30.093,-43.113 30.92,-43.113 R7.2
  Bottom Layer w0.386: J3.3 7.081,-55.94 ; v1(30.093,-51.114) 9.24,-51.114 7.081,-53.273 7.081,-55.94 ; v1(30.491,-55.403) 30.043,-54.954 8.067,-54.954 7.081,-55.94
NetJ3_4: J3.4 R8.2 U1.27 | length 51.1
  Top Layer w0.386: U1.27 28.322,-56.645 28.544,-56.423 v1(28.8,-56.423) ; R8.2 33.88,-46.491 37.612,-50.223 v1(37.612,-58.023)
  Bottom Layer w0.386: J3.4 9.621,-56.016 12.745,-56.016 13.304,-56.575 13.304,-57.845 14.117,-58.658 25.895,-58.658 ; v1(28.8,-56.423) 28.13,-56.423 25.895,-58.658 ; v1(37.612,-58.023) 37.136,-58.498 28.385,-58.498 28.226,-58.658 25.895,-58.658
NetJ3_6: J3.6 U1.12 | length 33.4
  Top Layer w0.386: U1.12 36.437,-58.245 37.453,-59.261 38.914,-59.261 39.314,-58.861 v1(39.314,-56.372)
  Bottom Layer w0.386: J3.6 14.701,-55.94 15.173,-55.468 28.404,-55.468 29.196,-55.468 30.1,-56.372 v1(39.314,-56.372)
NetJ4_1: J4.1 Q3.1 | length 17.9
  Top Layer w0.386: J4.1 7.525,-72.463 v1(8.021,-71.967)
  Bottom Layer w0.386: v1(8.021,-71.967) 7.233,-72.755 7.233,-76.26 8.376,-77.403 Q3.1
NetJ4_3: J4.3 U1.31 | length 29.8
  Top Layer w0.386: J4.3 8.3,-74.463 13.17,-69.593 21.013,-69.593 25.902,-64.703 25.902,-59.845 U1.31
NetJ4_4: J4.4 U1.30 | length 33
  Top Layer w0.386: J4.4 v1(8.189,-75.463) ; v1(24.937,-63.128) 24.937,-59.75 25.642,-59.045 U1.30
  Bottom Layer w0.386: v1(8.189,-75.463) 8.189,-74.309 15.067,-67.431 16.977,-67.431 17.608,-68.062 23.737,-68.062 24.937,-66.862 v1(24.937,-63.128)
NetJ4_5: J4.5 R6.1 | length 36
  Top Layer w0.386: J4.5 9.792,-76.463 16.149,-70.106 22.55,-70.106 23.812,-68.843 26.461,-68.843 26.893,-69.275 26.893,-70.012 27.655,-70.774 29.56,-70.774 30.297,-71.51 30.297,-75.969 31.135,-76.807 R6.1
NetJ5_1: J5.1 U1.9 | length 22.3
  Top Layer w0.386: U1.9 37.389,-60.645 v1(37.586,-60.842)
  Bottom Layer w0.386: J5.1 19.654,-63.484 21.61,-61.528 27.706,-61.528 29.709,-59.525 31.084,-59.525 32.402,-60.842 v1(37.586,-60.842)
NetJ5_2: J5.2 U1.10 | length 30.9
  Top Layer w0.386: U1.10 38.367,-59.845 v1(39.898,-61.376)
  Bottom Layer w0.386: J5.2 17.114,-64.881 21.203,-64.881 23.921,-62.163 26.156,-62.163 26.588,-62.595 38.679,-62.595 v1(39.898,-61.376)
NetJ5_3: J5.3 U1.11 | length 24.4
  Top Layer w0.386: v1(34.056,-59.877) 34.64,-59.045 U1.11
  Bottom Layer w0.386: J5.3 14.574,-62.239 15.946,-60.868 26.233,-60.868 27.802,-59.299 29.185,-59.011 33.19,-59.011 v1(34.056,-59.877)
NetJ5_4: J5.4 U1.23 | length 23.9
  Top Layer w0.386: J5.4 12.034,-62.265 12.207,-62.092 15.966,-62.092 25.926,-52.132 28.705,-52.132 29.338,-52.765 U1.23
NetJ5_5: J5.5 U1.24 | length 25.6
  Top Layer w0.386: v1(22.169,-59.877) 22.169,-57.159 25.75,-53.578 28.538,-53.578 U1.24
  Bottom Layer w0.386: J5.5 9.494,-62.163 11.78,-59.877 v1(22.169,-59.877)
NetJ5_6: J5.6 U1.25 | length 30.2
  Top Layer w0.386: v1(22.677,-65.516) 23.312,-64.881 23.312,-57.672 25.939,-55.045 U1.25
  Bottom Layer w0.386: J5.6 6.954,-64.83 7.64,-65.516 v1(22.677,-65.516)
NetJ5_7: J5.7 U1.26 | length 34
  Top Layer w0.386: v1(22.016,-66.811) 22.971,-66.811 23.972,-65.81 23.972,-57.769 25.896,-55.845 U1.26
  Bottom Layer w0.386: J5.7 4.414,-64.83 6.395,-66.811 v1(22.016,-66.811)
NetJ6_1: J6.1 K1.5 | length 13
  Top Layer w0.386: K1.5 2.255,-40.573 J6.1
NetK1_9: K1.9 Q1.1 | length 21.1
  Top Layer w0.386: K1.9 13.939,-37.525 13.939,-44.637 15.59,-46.288 Q1.1
NetQ1_2: Q1.2 R1.1 | length 5.8
  Top Layer w0.386: Q1.2 20.746,-47.558 20.873,-47.685 R1.1
NetQ2_1: Q2.1 R4.2 R5.1 | length 18.6
  Top Layer w0.386: Q2.1 16.682,-70.926 16.682,-74.482 18.663,-76.463 21.813,-76.463 23.31,-77.96 R4.2 26.918,-77.96 26.957,-77.999 R5.1
NetQ2_2: Q2.2 R2.1 R3.2 | length 12.9
  Top Layer w0.386: Q2.2 21.61,-72.196 24.062,-69.744 R3.2 25.496,-69.744 28.417,-72.665 R2.1
NetQ3_2: Q3.2 R4.1 | length 19.9
  Top Layer w0.386: Q3.2 23.769,-78.673 24.023,-78.927 28.925,-78.927 29.992,-79.994 29.992,-81.746 29.56,-82.178 27.821,-82.178 26.563,-80.92 R4.1
NetR1_2: R1.2 U1.2 | length 52.9
  Top Layer w0.386: v1(16.022,-68.386) 14.764,-68.386 10.891,-64.512 10.891,-62.29 12.313,-60.868 16.174,-60.868 26.595,-50.447 R1.2 ; U1.2 29.338,-63.738 v1(30.932,-65.331)
  Bottom Layer w0.386: v1(16.022,-68.386) 16.657,-69.021 27.242,-69.021 v1(30.932,-65.331)
NetR2_2: R2.2 U1.32 | length 9.9
  Top Layer w0.386: U1.32 27.249,-60.645 27.249,-68.156 R2.2
NetR6_2: R6.2 U1.1 | length 14.2
  Top Layer w0.386: U1.1 28.538,-64.17 29.662,-65.293 29.662,-66.608 30.83,-67.776 30.83,-73.212 31.465,-73.847 R6.2
pads on no net: J1. J1.3 J2.4 J4.7 J4.8 J5.8 K1.1 K1.6 U1.13 U1.14 U1.19 U1.20 U1.22 U2. U3.4

## Polygon pours and split planes (outlines as drawn)
no net on Multi-Layer (solid): 0.15,-87.025
GND on Bottom Layer "GND_L02_P000" (solid, remove dead copper, pour order 0): 53.65,-84.525 2.65,-84.525 2.65,-2.525 53.65,-2.525
GND on Top Layer "GND_L01_P003" (solid, remove dead copper, pour order 3): 53.65,-84.525 2.65,-84.525 2.65,-2.525 53.65,-2.525

## Silkscreen, mask and mechanical layers (free items; w line width, h text height)
Top Overlay:
  text "Securifi" at 21.588,-3.484 h2.54
Bottom Overlay:
  text "Securifi" at 33.805,-3.51 h2.54
  text "By Wouter Vergauwen & Elias De Broyer" at 46.784,-85.713 h1.27
Mechanical 1:
  lines w0.254: 0,-86.875 0.15,-87.025 56.325,-87.025 56.325,0 0,0 0,-86.875

## Text inside footprints (layer, text, board x,y; h text height)
J3: Top Overlay "1" at 2.636,-54.924 h1.52 r90
J5: Top Overlay "1" at 18.892,-65.592 h1.52 r270
Q1: Top Overlay "1" at 20.1,-46.998 h1.5
Q2: Top Overlay "3" at 20.354,-74.231 h1.5; Top Overlay "1" at 20.354,-71.636 h1.5
Q3: Top Overlay "3" at 20.227,-80.708 h1.5; Top Overlay "1" at 20.227,-78.113 h1.5
U2: Mechanical 13 "3" at 28.798,-14.03 h1.27 r270; Mechanical 13 "2" at 28.798,-11.489 h1.27 r270; Mechanical 13 "1" at 28.798,-8.944 h1.27 r270
U3: Top Overlay "3" at 28.623,-36.504 h0.81 r90; Top Overlay "1" at 24.001,-36.479 h0.81 r90; Top Overlay "4" at 26.388,-34.523 h0.81 r90